# Altium PCB FPC8P.pcbdoc
Units mm, origin at the board's own origin, x right, y up, seen from the top; angles counter-clockwise.
Board outline 41.1 x 34.7 mm, 2 copper layers (Top Layer, Bottom Layer); 1 components, 0 nets, 10 pads, 0 vias.
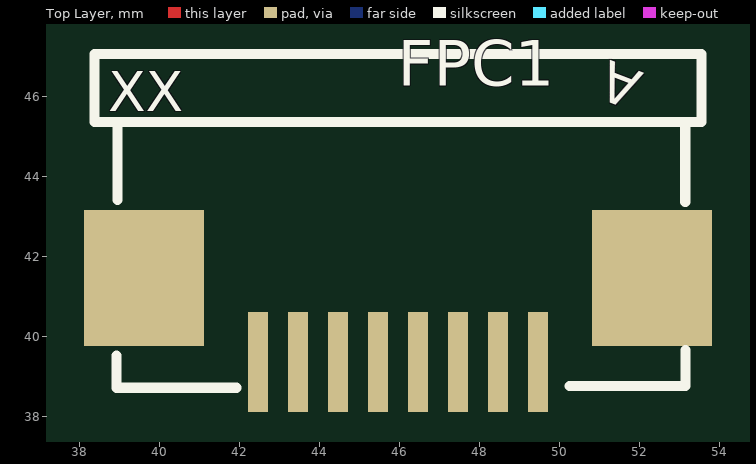
[diagram p0: Top Layer view]
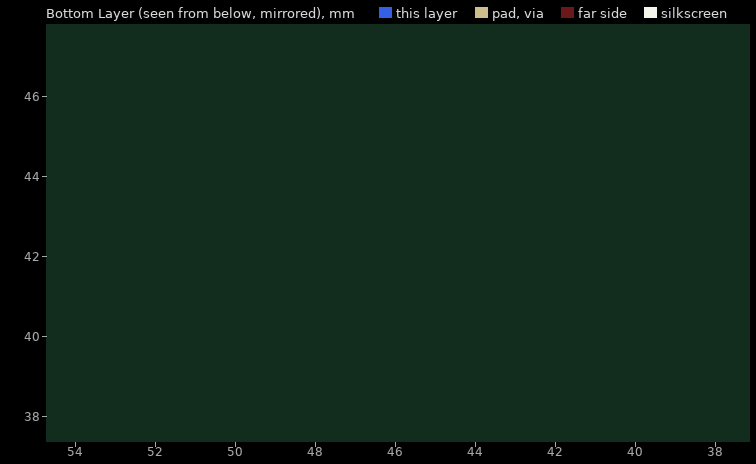
[diagram p1: Bottom Layer view, seen from below]

## Layer stack, top to bottom
Top Layer: signal copper (thickness not stored)
Dielectric: dielectric 0.32, FR-4, Dk 4.8
Bottom Layer: signal copper (thickness not stored)

## Board outline
66.5,25.4 25.4,25.4 25.4,60.104 66.5,60.104

## Components (designator, comment, footprint, x,y, rotation, side; value= is the part's Value field where it differs from the comment)
FPC1 "FPC-SMD_8PIN-PITCH1.00-BR_LW10251-08" FPC-SMD_8PIN-PITCH1.00-BR_LW10251-08 45.95,40.4 r0 top

## Footprints (in the part's own frame and the unit in brackets; to place one, negate y for a bottom-side part, rotate by r counter-clockwise, add the part's x,y. Pads: shape width x height; smd on the part's side, far side on the other; paste and mask are expansions set on the pad)
FPC-SMD_8PIN-PITCH1.00-BR_LW10251-08 [mm]
  rect 0.5x2.5 smd: 1(3.5,-1.05) 2(2.5,-1.05) 3(1.5,-1.05) 4(0.5,-1.05) 5(-0.5,-1.05) 6(-1.5,-1.05) 7(-2.5,-1.05) 8(-3.5,-1.05)
  rect 3x3.4 smd: 9(-6.35,1.05) 10(6.35,1.05)
  silkscreen extent -7.59,-1.69 7.59,6.65

## Nets (pads, with @x,y where several pads share a name; then routed paths per layer and width w, separated by ;. In a path a pad name is that pad's centre, name@x,y a point inside that pad or via, vN(x,y) a via of type N, cw(c..) or ccw(c..) an arc to the next point about the centre after c; other vN are vias at no path point)
pads on no net: FPC1.1 FPC1.2 FPC1.3 FPC1.4 FPC1.5 FPC1.6 FPC1.7 FPC1.8 FPC1.9 FPC1.10

## Silkscreen, mask and mechanical layers (free items; w line width, h text height)
Document:
  lines w0.003: 45.925,42.726 45.975,42.777

## Text inside footprints (layer, text, board x,y; h text height)
FPC1: Top Overlay "XX" at 38.711,45.615 h1; Top Overlay "A" at 52.12,46.572 h1 r159